# Altium PCB LiDAR_mainboard.PcbDoc
Units mm, origin at the board's own origin, x right, y up, seen from the top; angles counter-clockwise.
Board outline 65 x 56 mm, 2 copper layers (Top Layer, Bottom Layer); 61 components, 61 nets, 328 pads, 216 vias.
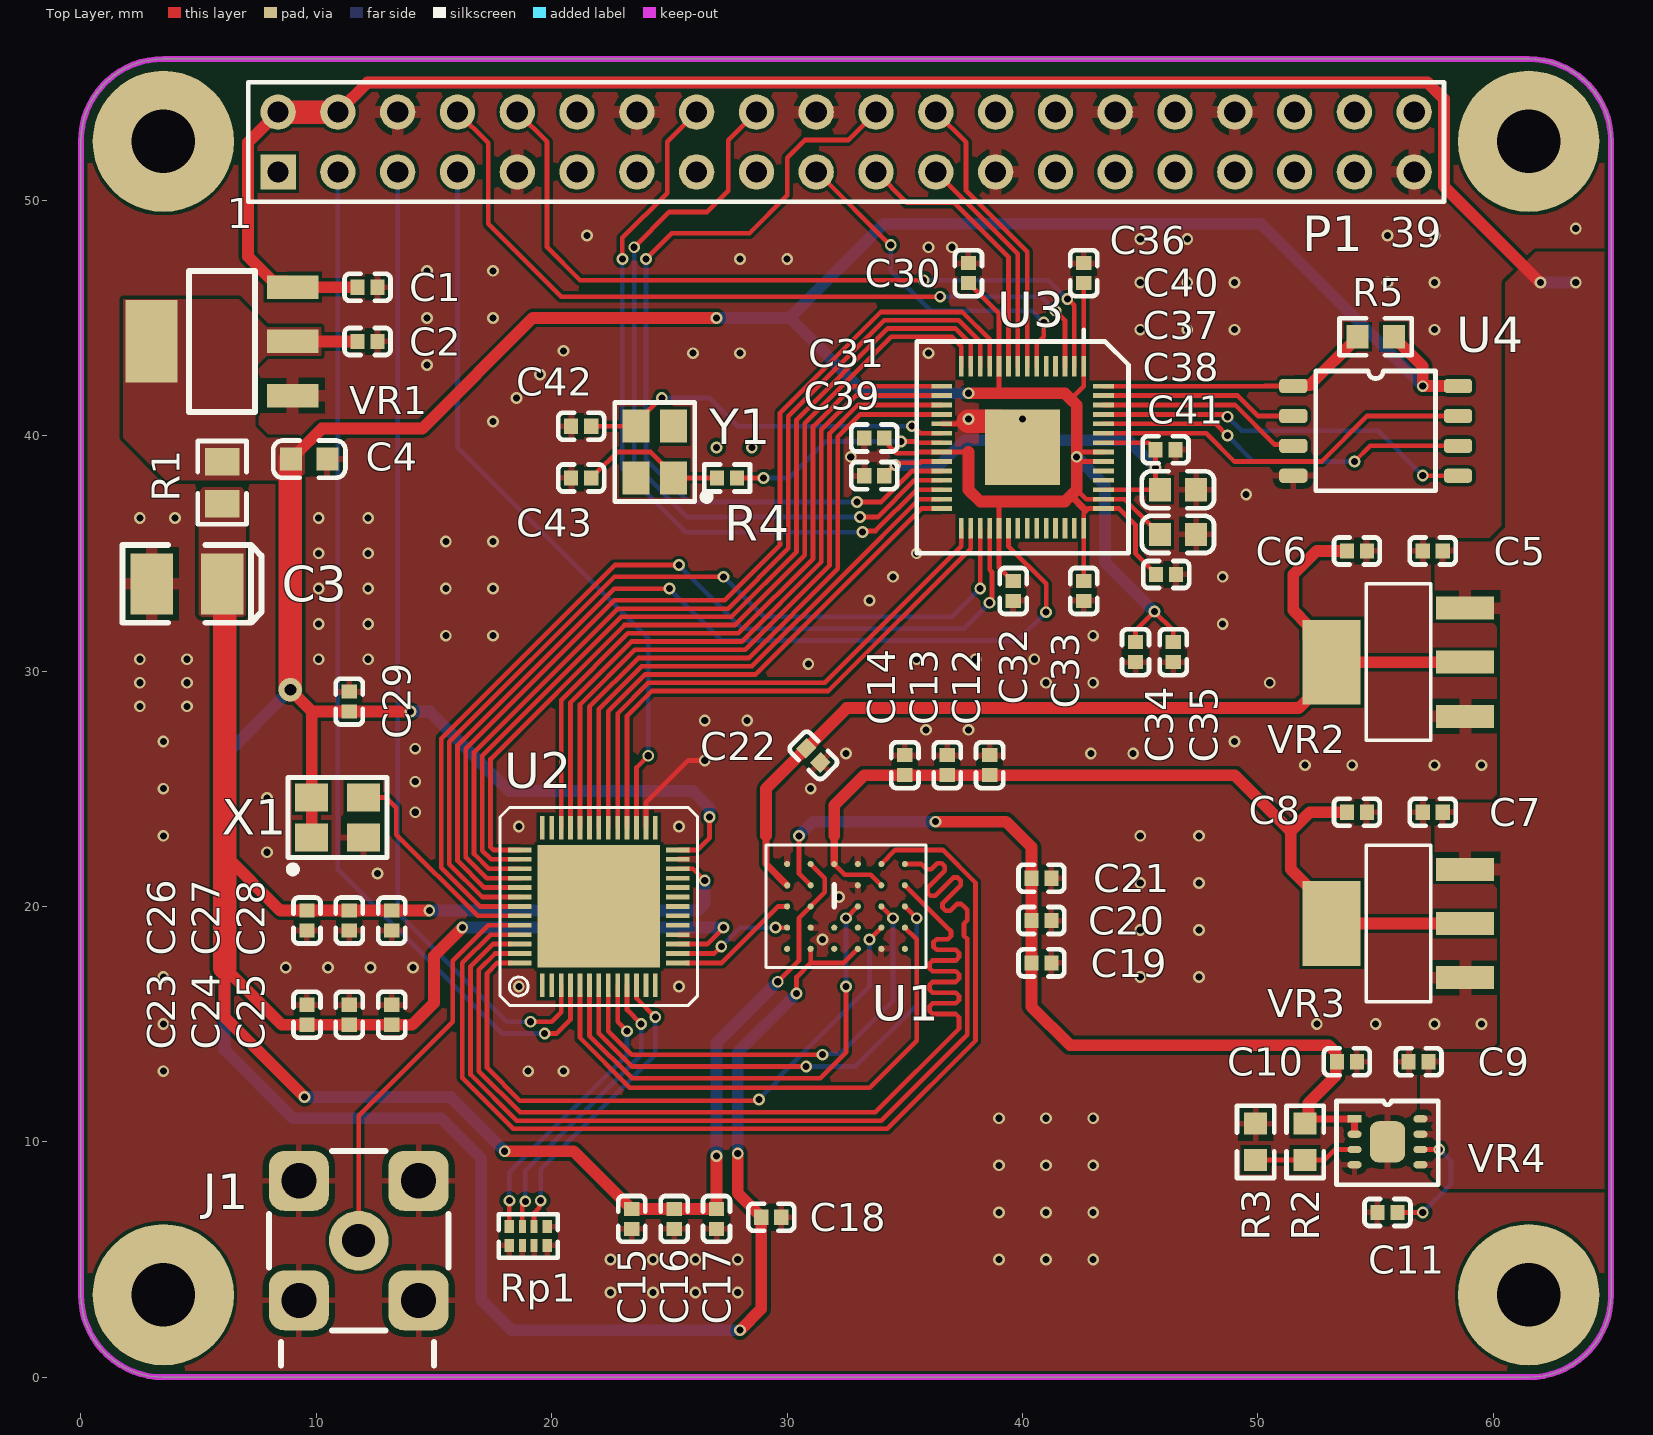
[diagram p0: Top Layer view]
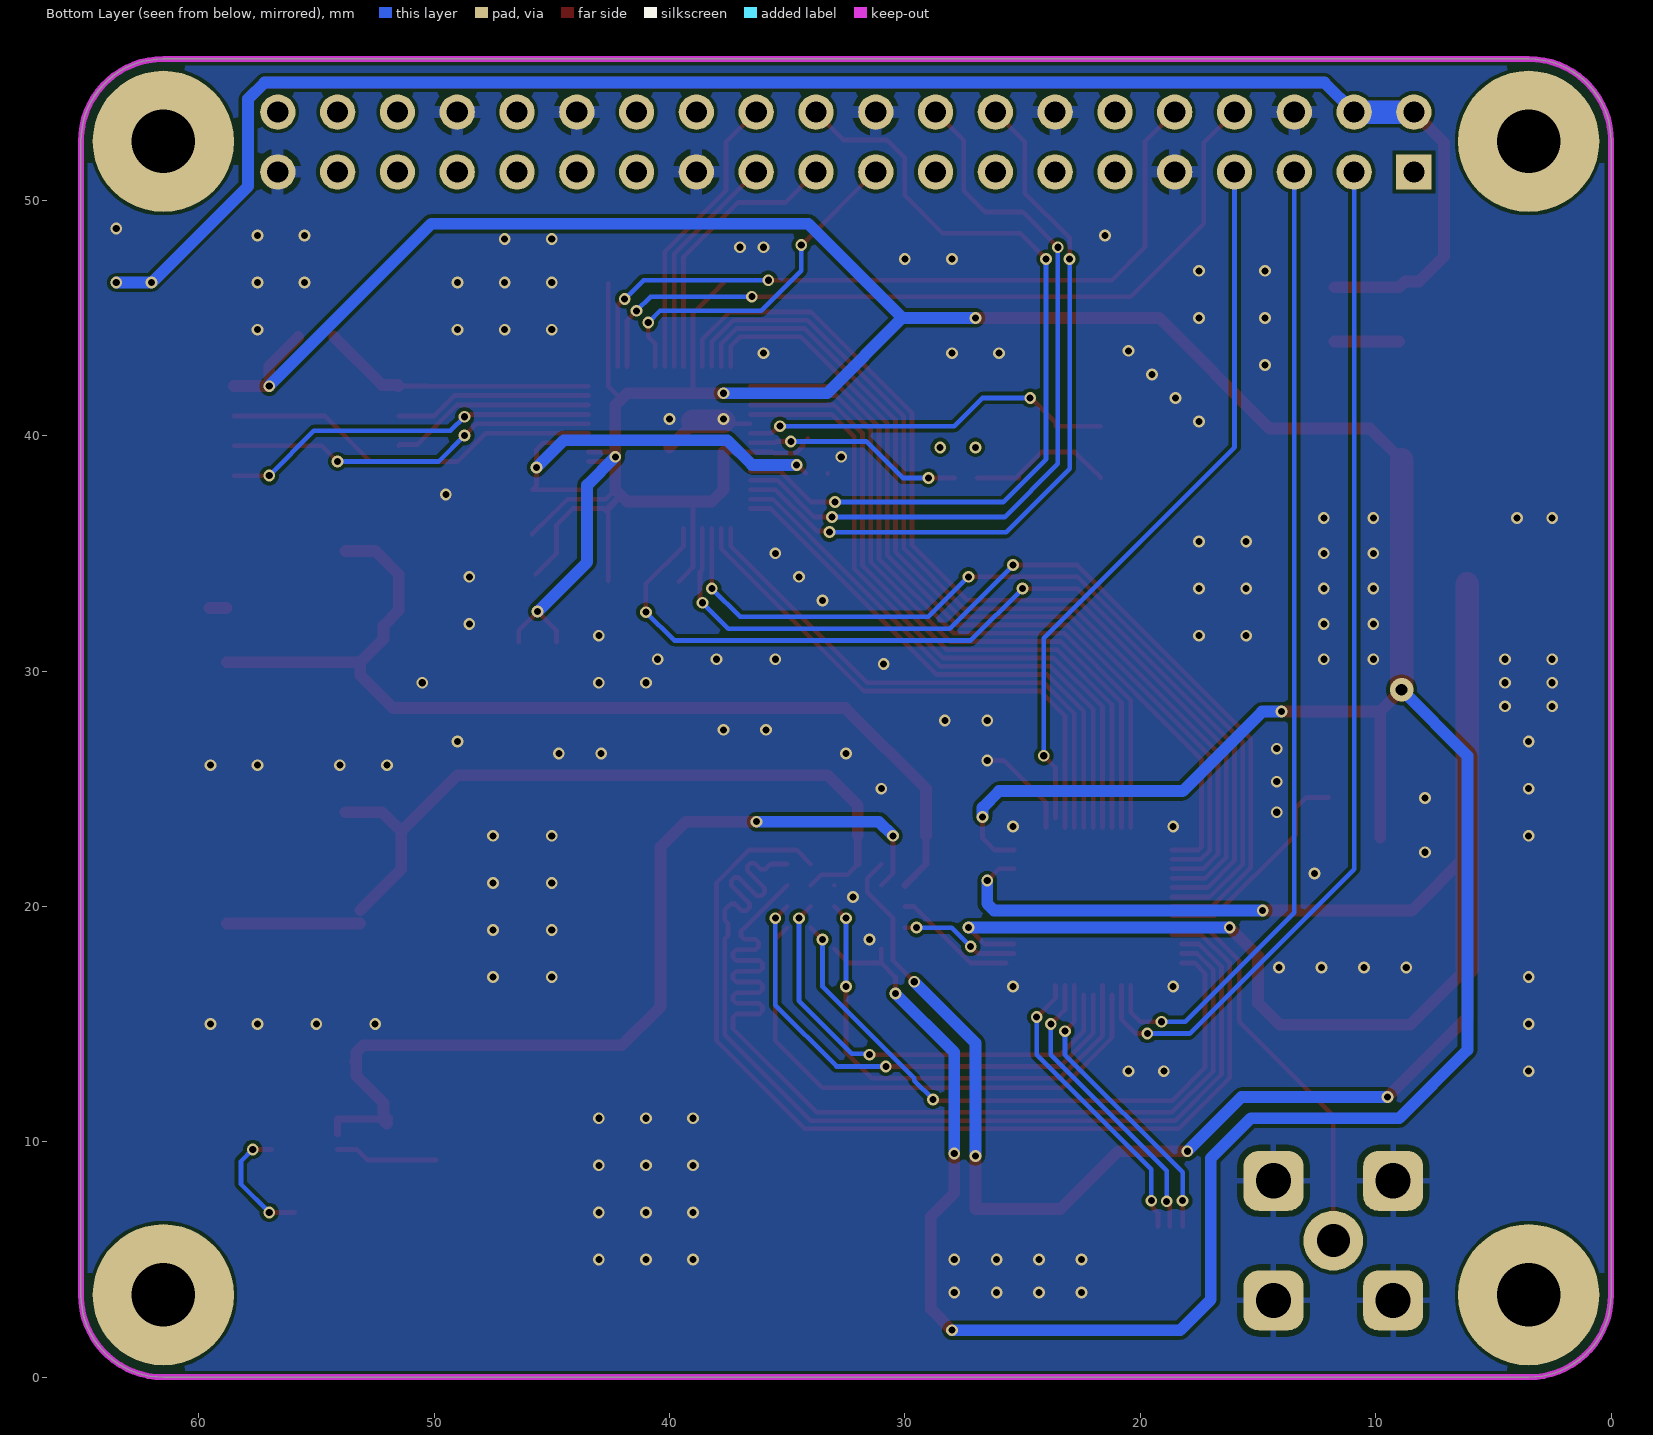
[diagram p1: Bottom Layer view, seen from below]
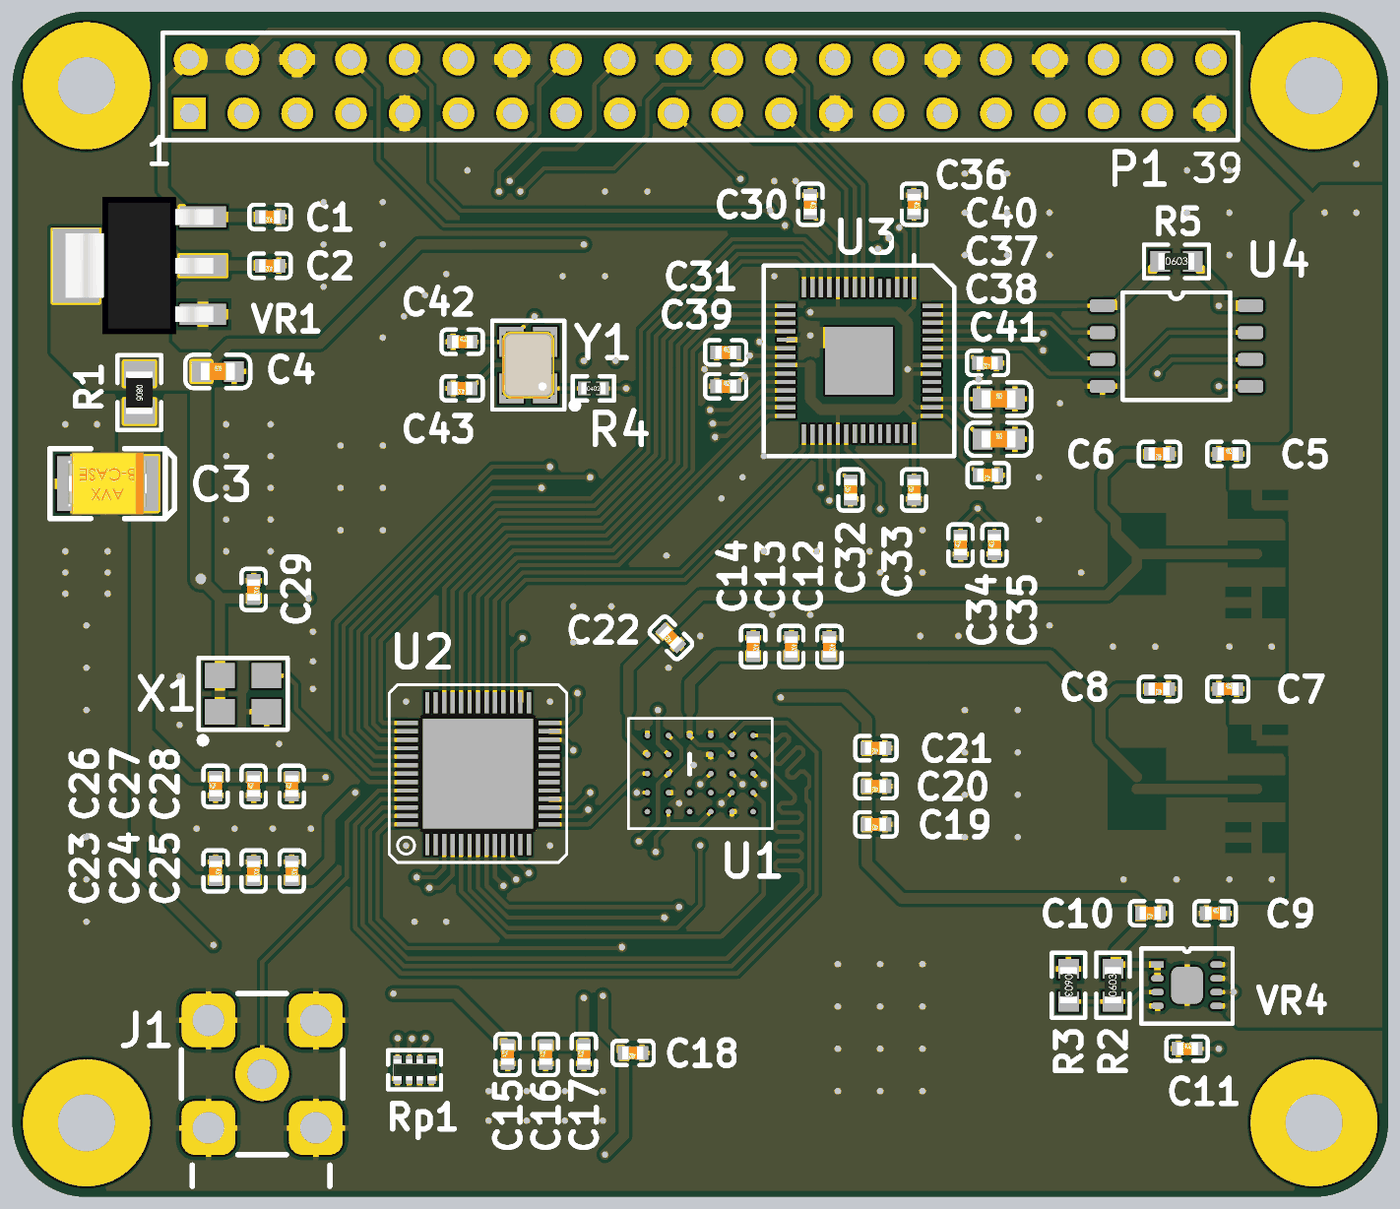
[diagram p2: 3D render of the assembled board from above, using the file's embedded part models]

## Layer stack, top to bottom
Top Solder: solder mask 0.0102, Solder Resist, Dk 3.5
Top Layer: signal copper 0.0356
Dielectric 1: dielectric 0.32, FR-4, Dk 4.8
Bottom Layer: signal copper 0.0356
Bottom Solder: solder mask 0.0102, Solder Resist, Dk 3.5

## Board outline
0,3.5 0,52.5 -0.001,52.5 cw(c3.5,52.5) 3.5,56.001 61.499,56.001 61.5,56 cw(c61.5,52.5) 65,52.5 65,3.5 cw(c61.5,3.5) 61.5,0 3.5,0 cw(c3.5,3.5)

## Design rules (kind name [scope] priority, off if disabled: settings)
Clearance [All] p1: gap=0.15 ignorepadtopadclearanceinfootprint=FALSE except(0: Arc-Hole Track-Hole SMDPad-Hole THPad-Hole Via-Hole Fill-Hole Poly-Hole Region-Hole Text-Hole)
HoleSize [All] p1: absolutevalues=TRUE maxlimit=6.3 minlimit=0.3 maxpercent=80.000 minpercent=20.000
Length Vout [InNetClass('Vout[2..1]')] p1: maxlimit=10 minlimit=0
MatchedLengths VTX_match [InNetClass('VTX[3..1]')] p1: tolerance=0.1 checknetsindiffpair=FALSE checkdiffpairvsdiffpair=TRUE checkxsignals=TRUE checkothers=TRUE usedelayunits=TRUE delaytolerance=10.000000
MatchedLengths Vout_match [InNetClass('Vout[2..1]')] p2: tolerance=0.2 checknetsindiffpair=FALSE checkdiffpairvsdiffpair=TRUE checkxsignals=TRUE checkothers=TRUE
MatchedLengths Data_match [InNetClass('Data[11..0]')] p3: tolerance=5 checknetsindiffpair=FALSE checkdiffpairvsdiffpair=TRUE checkxsignals=TRUE checkothers=TRUE usedelayunits=TRUE delaytolerance=5000.000000
MinimumSolderMaskSliver [All] p1: minsoldermaskwidth=0.08
PolygonConnect [All] p1: connectstyle=Relief reliefconductorwidth=0.254 reliefentries=4 polygonreliefangle="90 Angle" airgapwidth=0.254
RoutingCorners RoutingCorners_Matching [InNetClass('Vout[2..1]')] p1: cornerstyle=Round minsetback=0.5 maxsetback=1
RoutingCorners [All] p2: cornerstyle=45-Degree minsetback=1.27 maxsetback=2.54
RoutingVias [All] p1: holewidth=0.3 width=0.5 viastyle="Through Hole" minholewidth=0.3 minwidth=0.5 maxholewidth=0.5 maxwidth=1
SilkToSolderMaskClearance [IsPad] p1: minsilkscreentomaskgap=0.127 clearancetoexposedcopper=TRUE
SolderMaskExpansion [All] p1: expansion=0.102 istentingtop=FALSE
UnRoutedNet [All] p1: checkbadconnections=TRUE
Width [All] p1: maxlimit=2.54 minlimit=0.15 preferedwidth=0.2 minimp=50.000000 maximp=50.000000 favimp=50.000000
25 further rules are at their usual default settings.

## Classes and differential pairs
net class QSPI_SD[3..0]: QSPI_SD0 QSPI_SD1 QSPI_SD2 QSPI_SD3
net class VTX[3..1]: VTX1 VTX2 VTX3
net class Vout[2..1]: Vout1 Vout2
net class Data[11..0]: Data0 Data1 Data2 Data3 Data4 Data5 Data6 Data7 Data8 Data9 Data10 Data11

## Components (designator, comment, footprint, x,y, rotation, side; value= is the part's Value field where it differs from the comment)
C1 "10uF" 0402_C 12.175,46.3 r180 top
C2 "10uF" 0402_C 12.175,44 r180 top
C3 "100uF" CASE-B_3528 4.5,33.7 r0 top
C4 "10uF" 0603_C 9.7,39 r0 top
C5 "10uF" 0402_C 57.425,35.1 r0 top
C6 "10uF" 0402_C 54.2,35.1 r180 top
C7 "10uF" 0402_C 57.425,24 r0 top
C8 "10uF" 0402_C 54.2,24 r180 top
C9 "4.7uF" 0402_C 56.825,13.4 r0 top
C10 "4.7uF" 0402_C 53.775,13.4 r180 top
C11 "10nF" 0402_C 55.5,7 r0 top
C12 "10uF" 0402_C 38.6,26 r270 top
C13 "100nF" 0402_C 36.8,26 r270 top
C14 "10nF" 0402_C 35,26 r270 top
C15 "10uF" 0402_C 23.4,6.725 r90 top
C16 "100nF" 0402_C 25.2,6.725 r90 top
C17 "10nF" 0402_C 27,6.725 r90 top
C18 "100nF" 0402_C 29.325,6.8 r180 top
C19 "10uF" 0402_C 40.8,17.6 r180 top
C20 "100nF" 0402_C 40.8,19.4 r180 top
C21 "10nF" 0402_C 40.8,21.2 r180 top
C22 "100nF" 0402_C 31.113,26.412 r135 top
C23 "10uF" 0402_C 9.6,15.4 r270 top
C24 "100nF" 0402_C 11.4,15.4 r270 top
C25 "10nF" 0402_C 13.2,15.4 r270 top
C26 "10uF" 0402_C 9.6,19.4 r90 top
C27 "100nF" 0402_C 11.4,19.4 r90 top
C28 "10nF" 0402_C 13.2,19.4 r90 top
C29 "100nF" 0402_C 11.4,28.7 r270 top
C30 "100nF" 0402_C 37.7,46.9 r270 top
C31 "100nF" 0402_C 33.7,39.9 r0 top
C32 "100nF" 0402_C 39.6,33.4 r90 top
C33 "100nF" 0402_C 42.6,33.4 r90 top
C34 "100nF" 0402_C 44.8,30.8 r90 top
C35 "100nF" 0402_C 46.4,30.8 r90 top
C36 "100nF" 0402_C 42.6,46.9 r270 top
C37 "1uF" 0603_C 46.6,37.7 r0 top
C38 "1uF" 0603_C 46.6,35.8 r0 top
C39 "100nF" 0402_C 33.7,38.3 r0 top
C40 "100nF" 0402_C 46.075,39.4 r180 top
C41 "100nF (104) 10% 16V" 0402_C 46.1,34.1 r180 top
C42 "30pF" 0402_C 21.25,40.4 r0 top
C43 "30pF" 0402_C 21.25,38.2 r180 top
J1 "SMA_connector" SMA_header 11.8,5.8 r0 top
P1 "Header 20X2" HDR2X20 8.375,51.2 r0 top
R1 "0Ω (0R0) ±1%" 0805_R 6,38 r270 top
R2 "0Ω" 0603_R 52,10 r90 top
R3 "10KΩ" 0603_R 49.9,10 r270 top
R4 "1KΩ" 0402_R 27.45,38.2 r0 top
R5 "10KΩ (1002) ±1%" 0603_R 55,44.2 r0 top
Rp1 "10KΩ (103) ±5%" 0402_Rx4 19,6 r0 top
U1 "S15454-01WT Distance Area Image Sensor" S15454-01WT 32.5,20 r0 top
U2 "H15472-01" H15472-01 22,20 r0 top
U3 "RP2040" QFN-56 40,39.5 r270 top
U4 "W25Q128" SOIC-8 55,40.2 r0 top
VR1 "AMS1117-3.3" SOT-223 6,44 r0 top
VR2 "AMS1117-2.5" SOT-223-4_L6.5-W3.5-P2.30-LS7.0-BR -414.655,360.5 r0 top
VR3 "AMS1117-1.8" SOT-223-4_L6.5-W3.5-P2.30-LS7.0-BR -414.655,349.4 r0 top
VR4 "TPS7A80" SON_8 54.1,10.975 r0 top
X1 "SG-8018CE-60.000000MHZ-TJHPA" OSC-SMD_4P-L3.2-W2.5-BL_SIT8008BI 10.9,23.5 r0 top
Y1 "12MHZ" SMD-3225_4P 24.375,39.3 r90 top

## Footprints (in the part's own frame and the unit in brackets; to place one, negate y for a bottom-side part, rotate by r counter-clockwise, add the part's x,y. Pads: shape width x height; smd on the part's side, far side on the other; paste and mask are expansions set on the pad)
0402_C [mm]
  rect 0.6x0.65 smd mask+0.051: 1(-0.425,0) 2(0.425,0)
  silkscreen extent -0.97,-0.58 0.97,0.58, body extent -0.48,-0.3 0.52,0.3, height 0.2
0402_R [mm]
  rect 0.6x0.65 smd mask+0.051: 1(-0.425,0) 2(0.425,0)
  silkscreen extent -0.97,-0.58 0.97,0.58, body extent -0.57,-0.27 0.58,0.28, height 0.41
0402_Rx4 [mm]
  rect 0.4x0.55 smd mask+0.051: 1(-0.8,-0.4) 4(0.8,-0.4) 5(0.8,0.4) 8(-0.8,0.4)
  rect 0.3x0.55 smd mask+0.051: 2(-0.25,-0.4) 3(0.25,-0.4) 6(0.25,0.4) 7(-0.25,0.4)
  silkscreen extent -1.25,-0.93 1.25,0.92, body extent -1,-0.5 1,0.5, height 0.45
0603_C [mm]
  rect 0.93x0.98 smd: 1(-0.77,0) 2(0.77,0)
  silkscreen extent -1.53,-0.79 1.54,0.79, body extent -0.8,-0.4 0.8,0.4, height 0.3
0603_R [mm]
  rect 0.93x0.98 smd: 1(-0.77,0) 2(0.77,0)
  silkscreen extent -1.53,-0.79 1.54,0.79, body extent -0.85,-0.4 0.85,0.4, height 0.56
0805_R [mm]
  rect 1.16x1.47 smd: 1(-0.89,0) 2(0.89,0)
  silkscreen extent -1.77,-1.04 1.77,1.03, body extent -1,-0.62 1,0.63, height 0.49
CASE-B_3528 [mm]
  rect 1.8x2.6 smd: 1(1.5,0) 2(-1.5,0)
  silkscreen extent -2.73,-1.65 3.16,1.65, body extent -1.85,-1.47 1.85,1.46, height 2.03
H15472-01 [mm]
  rect 5.2x5.2 smd mask+0.178: GND(0,0)
  rect 0.2x1 smd: P1(-2.4,-3.35) P2(-2,-3.35) P3(-1.6,-3.35) P4(-1.2,-3.35) P5(-0.8,-3.35) P6(-0.4,-3.35) P7(0,-3.35) P8(0.4,-3.35) P9(0.8,-3.35) P10(1.2,-3.35) P11(1.6,-3.35) P12(2,-3.35) P13(2.4,-3.35) P27(2.4,3.35) P28(2,3.35) P29(1.6,3.35) P30(1.2,3.35) P31(0.8,3.35) P32(0.4,3.35) P33(0,3.35) P34(-0.4,3.35) P35(-0.8,3.35) P36(-1.2,3.35) P37(-1.6,3.35) P38(-2,3.35) P39(-2.4,3.35)
  rect 1x0.2 smd: P14(3.35,-2.4) P15(3.35,-2) P16(3.35,-1.6) P17(3.35,-1.2) P18(3.35,-0.8) P19(3.35,-0.4) P20(3.35,0) P21(3.35,0.4) P22(3.35,0.8) P23(3.35,1.2) P24(3.35,1.6) P25(3.35,2) P26(3.35,2.4) P40(-3.35,2.4) P41(-3.35,2) P42(-3.35,1.6) P43(-3.35,1.2) P44(-3.35,0.8) P45(-3.35,0.4) P46(-3.35,0) P47(-3.35,-0.4) P48(-3.35,-0.8) P49(-3.35,-1.2) P50(-3.35,-1.6) P51(-3.35,-2) P52(-3.35,-2.4)
  silkscreen extent -4.2,-4.2 4.2,4.2, body extent -3.6,-3.6 3.6,3.6, height 0.86
HDR2X20 [mm] "Connector; Header; 20x2 Position"
  rect 1.5x1.5 hole 0.9: 1(0,0)
  round 1.5 hole 0.9: 2(0,2.54) 3(2.54,0) 4(2.54,2.54) 5(5.08,0) 6(5.08,2.54) 7(7.62,0) 8(7.62,2.54) 9(10.16,0) 10(10.16,2.54) 11(12.7,0) 12(12.7,2.54) 13(15.24,0) 14(15.24,2.54) 15(17.78,0) 16(17.78,2.54) 17(20.32,0) 18(20.32,2.54) 19(22.86,0) 20(22.86,2.54) 21(25.4,0) 22(25.4,2.54) 23(27.94,0) 24(27.94,2.54) 25(30.48,0) 26(30.48,2.54) 27(33.02,0) 28(33.02,2.54) 29(35.56,0) 30(35.56,2.54) 31(38.1,0) 32(38.1,2.54) 33(40.64,0) 34(40.64,2.54) 35(43.18,0) 36(43.18,2.54) 37(45.72,0) 38(45.72,2.54) 39(48.26,0) 40(48.26,2.54)
  silkscreen extent -1.27,-1.27 49.53,3.81
OSC-SMD_4P-L3.2-W2.5-BL_SIT8008BI [mm]
  rect 1.4x1.2 smd: 1(-1.1,-0.576) 3(1.1,1.124) 4(-1.1,1.124)
  rect 1.4x1.2 smd mask+0.102: 2(1.1,-0.576)
  silkscreen extent -2.1,-2.08 2.1,1.97
QFN-56 [mm]
  rect 0.875x0.2 smd: 1(-3.437,2.6) 2(-3.437,2.2) 3(-3.437,1.8) 4(-3.437,1.4) 5(-3.437,1) 6(-3.437,0.6) 7(-3.437,0.2) 8(-3.437,-0.2) 9(-3.437,-0.6) 10(-3.437,-1) 11(-3.437,-1.4) 12(-3.437,-1.8) 13(-3.437,-2.2) 14(-3.437,-2.6) 29(3.437,-2.6) 30(3.437,-2.2) 31(3.437,-1.8) 32(3.437,-1.4) 33(3.437,-1) 34(3.437,-0.6) 35(3.437,-0.2) 36(3.437,0.2) 37(3.437,0.6) 38(3.437,1) 39(3.437,1.4) 40(3.437,1.8) 41(3.437,2.2) 42(3.437,2.6)
  rect 0.2x0.875 smd: 15(-2.6,-3.437) 16(-2.2,-3.437) 17(-1.8,-3.437) 18(-1.4,-3.437) 19(-1,-3.437) 20(-0.6,-3.437) 21(-0.2,-3.437) 22(0.2,-3.437) 23(0.6,-3.437) 24(1,-3.437) 25(1.4,-3.437) 26(1.8,-3.437) 27(2.2,-3.437) 28(2.6,-3.437) 43(2.6,3.437) 44(2.2,3.437) 45(1.8,3.437) 46(1.4,3.437) 47(1,3.437) 48(0.6,3.437) 49(0.2,3.437) 50(-0.2,3.437) 51(-0.6,3.437) 52(-1,3.437) 53(-1.4,3.437) 54(-1.8,3.437) 55(-2.2,3.437) 56(-2.6,3.437)
  rect 3.2x3.2 smd: 57(0,0)
  silkscreen extent -5,-4.5 4.5,4.5
S15454-01WT [mm]
  rrect100% 0.26x0.26 smd: A1(-2.5,1.8) A2(-1.5,1.8) A3(-0.5,1.8) A4(0.5,1.8) A5(1.5,1.8) A6(2.5,1.8) B1(-2.5,0.9) B2(-1.5,0.9) B4(0.5,0.9) B5(1.5,0.9) B6(2.5,0.9) C1(-2.5,0) C2(-1.5,0) C4(0.5,0) C5(1.5,0) C6(2.5,0) D1(-2.5,-0.9) D2(-1.5,-0.9) D3(-0.5,-0.9) D4(0.5,-0.9) D5(1.5,-0.9) D6(2.5,-0.9) E1(-2.5,-1.8) E2(-1.5,-1.8) E3(-0.5,-1.8) E4(0.5,-1.8) E5(1.5,-1.8) E6(2.5,-1.8)
  silkscreen extent -3.4,-2.6 3.4,2.6, body extent -3.4,-2.6 3.4,2.6, height 0.33
SMA_header [mm]
  round 2.54 hole 1.4: 1(0,0)
  rrect50% 2.54x2.54 hole 1.5: 2(-2.54,2.54) 3(-2.54,-2.54) 4(2.54,-2.54) 5(2.54,2.54)
  silkscreen extent -3.81,-3.81 3.81,3.81
SMD-3225_4P [mm]
  rect 1.4x1.15 smd: 1(-1.1,-0.8) 2(1.1,-0.8) 3(1.1,0.8) 4(-1.1,0.8)
  silkscreen extent -2.1,-2.35 2.1,1.7, body extent -1.6,-1.25 1.6,1.25, height 0.61
SOIC-8 [mm]
  rrect50% 1.2x0.6 smd: 1(-3.5,1.905) 2(-3.5,0.635) 3(-3.5,-0.635) 4(-3.5,-1.905) 5(3.5,-1.905) 6(3.5,-0.635) 7(3.5,0.635) 8(3.5,1.905)
  silkscreen extent -2.54,-2.54 2.54,2.54
SON_8 [mm]
  rect 0.6x0.31 smd: 1(0,0)
  oval 0.6x0.31 smd: 2(0,-0.65) 3(0,-1.3) 4(0,-1.95) 5(2.8,-1.95) 6(2.8,-1.3) 7(2.8,-0.65) 8(2.8,0)
  rrect50% 1.5x1.75 smd: 9(1.4,-0.975)
  silkscreen extent -0.76,-2.79 3.56,0.76
SOT-223 [mm]
  rect 2.2x1 smd: 1(3,-2.3) 2(3,0) 3(3,2.3)
  rect 2.2x3.5 smd: 2(-3,0)
  silkscreen extent -1.4,-3 1.4,3, body extent -3.49,-3.24 3.49,3.24, height 1.64
SOT-223-4_L6.5-W3.5-P2.30-LS7.0-BR [mm]
  rect 2.47x0.98 smd: 1(473.455,-332.424) 2(473.455,-330.124) 3(473.455,-327.824)
  rect 2.47x3.6 smd: 4(467.785,-330.124)
  silkscreen extent 469.25,-333.45 471.99,-326.8

## Part data
C1 C2 C5 C6 C7 C8 C12 C15 C19 C23 C26: library part "0402 10uF (106) 20% 6.3V", "贴片电容", Package=0402, SuppliersPartNumber=C15525, ComponentLink1Description=供应商链接, ComponentLink1URL=http://www.szlcsc.com/product/details_16204.html, Supplier=LC
C3: library part "3528 100uF (107) 10% 6.3V", "钽电容", Package=3528, SuppliersPartNumber=C16133, ComponentLink1Description=供应商链接, ComponentLink1URL=http://www.szlcsc.com/product/details_16815.html, Supplier=LC
C4: library part "0603 10uF (106) 10% 10V", "贴片电容", Package=0603, SuppliersPartNumber=C19702, ComponentLink1Description=供应商链接, ComponentLink1URL=http://www.szlcsc.com/product/details_20411.html, Supplier=LC
C9 C10: library part "0402 4.7uF (475) 20% 10V", "贴片电容", Package=0402, SuppliersPartNumber=C23733, ComponentLink1Description=供应商链接, ComponentLink1URL=http://www.szlcsc.com/product/details_24469.html, Supplier=LC
C11 C14 C17 C21 C25 C28: library part "0402 10nF (103) 10% 50V", "贴片电容", Package=0402, SuppliersPartNumber=C15195, ComponentLink1Description=供应商链接, ComponentLink1URL=http://www.szlcsc.com/product/details_15869.html, Supplier=LC
C13 C16 C18 C20 C22 C24 C27 C29 C30 C31 C32 C33 C34 C35 C36 C39 C40 C41: library part "0402 100nF (104) 10% 16V", "贴片电容", Package=0402, SuppliersPartNumber=C1525, ComponentLink1Description=供应商链接, ComponentLink1URL=http://www.szlcsc.com/product/details_1877.html, Supplier=LC
C37 C38: library part "0603 1uF (105) 10% 50V", "贴片电容", Package=0603, SuppliersPartNumber=C15849, ComponentLink1Description=供应商链接, ComponentLink1URL=http://www.szlcsc.com/product/details_16531.html, Supplier=LC
C42 C43: library part "0402 30pF (300) 5% 50V", "贴片电容", Package=0402, SuppliersPartNumber=C1570, ComponentLink1Description=供应商链接, ComponentLink1URL=http://www.szlcsc.com/product/details_1922.html, Supplier=LC
P1: "Header, 20-Pin, Dual row", LatestRevisionDate=17-Jul-2002, LatestRevisionNote="Re-released for DXP Platform.", Publisher="Altium Limited"
R1: library part "0805 0Ω (0R0) 1%", "贴片电阻", Package=0805, SuppliersPartNumber=C17477, ComponentLink1Description=供应商链接, ComponentLink1URL=http://www.szlcsc.com/product/details_18165.html, Supplier=LC
R2: library part "0603 0Ω (0R0) 1%", "贴片电阻", Package=0603, SuppliersPartNumber=C21189, ComponentLink1Description=供应商链接, ComponentLink1URL=http://www.szlcsc.com/product/details_21903.html, Supplier=LC
R3 R5: library part "0603 10KΩ (1002) 1%", "贴片电阻", Package=0603, SuppliersPartNumber=C25804, ComponentLink1Description=供应商链接, ComponentLink1URL=http://www.szlcsc.com/product/details_26547.html, Supplier=LC
R4: library part "0402 1KΩ (1001) 1%", "贴片电阻", Package=0402, SuppliersPartNumber=C11702, ComponentLink1Description=供应商链接, ComponentLink1URL=http://www.szlcsc.com/product/details_12256.html, Supplier=LC
Rp1: library part "0402*4 10KΩ (103) 5%", "贴片排阻", Package=0402*4, SuppliersPartNumber=C25725, ComponentLink1Description=供应商链接, ComponentLink1URL=http://www.szlcsc.com/product/details_26468.html, Supplier=LC
U1: library part S15454-01WT, "Hamamatsu area distance image sensor", DeviceSetName=S15454-01WT, GateName_1=G$1, LibraryName="Hamamatsu Distance Image Sensors", Package=S15454-01WT, SymbolName_1=S15454-01WT
U2: "ASIC for distance image sensors", DeviceSetName=H15472-01, GateName_1=G$1, LibraryName="Hamamatsu Distance Image Sensors", Package=H15472-01, SymbolName_1=H15472-01
VR1: library part "SOT-223 AMS1117-3.3", "低压差线性稳压(LDO)", Package=SOT-223, SuppliersPartNumber=C6186, ComponentLink1Description=供应商链接, ComponentLink1URL=http://www.szlcsc.com/product/details_6652.html, Supplier=LC
Y1: library part "SMD-3225_4P  12MHZ 20PF 10PPM", "贴片晶振", Package=SMD-3225_4P, SuppliersPartNumber=C9002, ComponentLink1Description=供应商链接, ComponentLink1URL=http://www.szlcsc.com/product/details_9522.html, Supplier=LC

## Free pads (board coordinates)
  round 6 hole 2.7: 1(3.5,52.5) 2(61.5,52.5) 3(3.5,3.5) 4(61.5,3.5)

## Via types
v1: diameter 0.5, hole 0.3, Top Layer to Bottom Layer, tented both sides, 214 vias
v2: diameter 0.5, hole 0.3, Top Layer to Bottom Layer, tented bottom, 1 vias
v3: diameter 1, hole 0.5, Top Layer to Bottom Layer, tented both sides, 1 vias

## Nets (pads, with @x,y where several pads share a name; then routed paths per layer and width w, separated by ;. In a path a pad name is that pad's centre, name@x,y a point inside that pad or via, vN(x,y) a via of type N, cw(c..) or ccw(c..) an arc to the next point about the centre after c; other vN are vias at no path point)
+A0V8: C10.2 C19.2 C20.2 C21.2 R2.2 U1.B2 VR4.1 VR4.2 | length 39.7
  Top Layer w0.2: v1(30.5,23) 30.5,21.399 U1.B2
  Top Layer w0.3: R2.2@52.205,10.975 VR4.1 VR4.2
  Top Layer w0.5: v1(36.3,23.6) 39.3,23.6 40.375,22.525 C21.2 C20.2 C19.2 40.375,15.741 42.016,14.1 53.007,14.1 53.3,13.807 53.3,13.45 C10.2 53.3,13.35 53.3,12.8 52.143,11.643 52.143,10.985 52.133,10.975 R2.2@52,10.975 ; R2.2 R2.2@52.205,10.975
  Bottom Layer w0.5: v1(30.5,23) 31.1,23.6 v1(36.3,23.6)
+A1V8: C8.2 C12.2 C13.2 C14.2 U1.A3 U1.B5 VR3.2 VR3.4 | length 38.2
  Top Layer w0.2: U1.A3 32.45,21.35 33.55,21.35 U1.B5
  Top Layer w0.3: U1.A3 32,23
  Top Layer w0.5: 32,23 32,24.3 33.275,25.575 C14.2 C13.2 C12.2 ; C12.2@38.625,25.575 49.017,25.575 51.396,23.196 ; VR3.4 VR3.2 ; VR3.4@53.13,19.841 51.396,21.575 51.396,23.196 ; C8.2 52.2,24 51.396,23.196
+A2V5: C6.2 C22.2 U1.B1 VR2.2 VR2.4 | length 43.8
  Top Layer w0.3: 29.1,23 29.1,21.799 U1.B1
  Top Layer w0.5: 29.1,23 29.1,25 32.525,28.425 42,28.425 43.8,28.425 51.725,28.425 52.126,28.826 52.145,28.826 53.13,29.811 VR2.4 ; C6.2 52.5,35.1 51.5,34.1 51.5,32.576 52.145,31.931 52.145,31.361 VR2.4 ; VR2.2 VR2.4
+A3V3: C3.1 C15.2 C16.2 C17.2 C23.2 C24.2 C25.2 C26.2 C27.2 C28.2 R1.2 U1.A2 U1.C2 U2.P16 U2.P24 | length 110.6
  Top Layer w0.2: U2.P16 26.6,18.4 v1(27.3,19.1) ; U2.P24 26,21.599 v1(26.5,21.1) ; v1(29.6,16.8) 30.5,17.7 30.5,19.5 U1.C2 31.6,20.6 31.6,21.2 U1.A2
  Top Layer w0.5: 6.1,22.2 8.475,19.825 C26.2 C27.2 C28.2 v1(14.8,19.825) ; v1(9.5,11.9) 6.1,15.3 6.1,17.4 8.525,14.975 C23.2 C24.2 C25.2 14.075,14.975 15,15.9 15,17.9 v1(16.2,19.1) ; v1(18,9.6) 20.925,9.6 23.375,7.15 C15.2 C16.2 C17.2 v1(27,9.4)
  Top Layer w1: 6.1,17.4 6.1,22.2 C3.1@6.1,33.7
  Bottom Layer w0.5: v1(9.5,11.9) 15.7,11.9 v1(18,9.6) ; v1(14.8,19.825) 26.207,19.825 26.5,20.118 v1(26.5,21.1) ; v1(16.2,19.1) v1(27.3,19.1) ; v1(27,9.4) 27,14.2 v1(29.6,16.8)
+D1V1: C37.1 C39.2 C40.2 U3.23 U3.45 U3.50 | length 21
  Top Layer w0.2: C39.2@34.2,38.4 34.552,38.752 v1(34.596,38.752) ; v1@34.6,38.8 34.65,38.85 35.652,38.85 35.702,38.9 U3.23 ; U3.45 C37.1 45.65,37.88 v1(45.65,38.64) C40.2 45.35,39.7 U3.50
  Bottom Layer w0.5: v1(34.596,38.752) 36.493,38.752 37.541,39.8 44.49,39.8 v1(45.65,38.64)
+D3V3: C2.2 C4.1 C18.2 C29.2 C30.2 C31.2 C32.2 C33.2 C34.2 C35.2 C36.2 C38.1 C41.2 R1.1 R5.2 U1.E2 U1.E4 U2.P26 U3.1 U3.10 U3.22 U3.33 U3.42 U3.43 U3.44 U3.48 U3.49 U4.8 VR1.2 X1.1 X1.4 | length 235.5
  Top Layer w0.2: U2.P26 26.2,22.4 26.7,22.9 v1(26.7,23.8) ; v1(30.4,16.3) 30.4,17 31,17.6 ; U1.E2 31,17.6 ; U1.E4 32.4,17.6 31,17.6 ; C31.2@34.125,39.875 34.325,39.675 34.325,39.561 34.636,39.25 35.557,39.25 35.607,39.3 U3.22 37.7,39.3 ; C30.2 37.725,46.475 37.925,46.275 37.925,46.25 39,45.175 U3.10 39,41.8 ; 39,37.2 U3.33 39,34.4 39.375,34.025 C32.2@39.6,33.8 ; 42.05,41.55 42.6,42.1 U3.1 C36.2 ; 42.3,37.7 42.7,37.3 U3.44 44.33,37.3 45.44,36.19 45.465,36.19 45.83,35.825 C38.1 ; v1@42.3,38.9 U3.48 ; v1@42.3,39.3 U3.49 ; C33.2 U3.42 42.6,36.7 42.8,36.9 U3.43 44.1,36.9 44.8,36.2 44.8,34.975 C41.2 ; C34.2 44.8,31.725 v1(45.6,32.525) 46.4,31.725 C35.2
  Top Layer w0.3: 42.05,37.45 42.641,36.859
  Top Layer w0.5: v3(8.9,29.2) 9.8,28.3 9.8,28.275 ; C4.1 8.93,39.025 9.145,39.24 9.17,39.24 10.23,40.3 14.5,40.3 19.2,45 v1(27,45) ; VR1.2@9,44 C2.2 ; X1.1 X1.4@9.8,24.523 ; X1.4 9.8,28.275 ; v1(14,28.275) C29.2 9.8,28.275 ; v1(27.9,9.5) 27.9,7.825 28.9,6.825 C18.2 ; v1(28,2) 28.9,2.9 C18.2@28.9,6.775 ; 37.7,39.3 37.7,37.7 38.2,37.2 39,37.2 41.8,37.2 42.05,37.45 42.3,37.7 42.3,38.9 v1(42.3,39.1) 42.3,39.3 42.3,41.3 42.05,41.55 41.8,41.8 v1(37.7,41.8) ; R5.2 55.77,44.175 57,42.945 v1(57,42.1) 57.005,42.105 U4.8
  Top Layer w1: v3(8.9,29.2) C4.1@8.9,38.97
  Bottom Layer w0.5: v3(8.9,29.2) 6.1,26.4 6.1,13.9 9,11 15.3,11 17,9.3 17,3.3 18.3,2 v1(28,2) ; v1(14,28.275) 14.825,28.275 18.2,24.9 26,24.9 26.7,24.2 v1(26.7,23.8) ; v1(27,45) 30.1,45 ; v1(27.9,9.5) 27.9,13.8 v1(30.4,16.3) ; v1(37.7,41.8) 33.3,41.8 30.1,45 ; v1(42.3,39.1) 43.5,37.9 43.5,34.625 v1(45.6,32.525) ; v1(57,42.1) 57,42.11 50.11,49 34.1,49 30.1,45
+D5V0: C1.2 C5.2 C7.2 C9.2 P1.2 P1.4 VR1.3 VR2.3 VR3.3 VR4.5 VR4.7 VR4.8 | length 133.8
  Top Layer w0.5: P1.2 7.1,52.465 7.1,47.6 8.15,46.55 8.75,46.55 VR1.3 C1.2 ; P1.4 12.175,55 57.2,55 57.9,54.3 57.9,50.6 v1(62,46.5) ; VR2.3 VR2.3@59.545,32.676
  Top Layer w1: P1.2 P1.4
  Bottom Layer w0.5: P1.4 12.175,55 57.2,55 57.9,54.3 57.9,50.6 v1(62,46.5) v1(63.5,46.5)
  Bottom Layer w1: P1.2 P1.4
All_Reset: P1.7 U2.P29 | length 31
  Top Layer w0.2: U2.P29@23.6,23.75 23.6,25.9 v1(24.1,26.4)
  Bottom Layer w0.2: P1.7 15.995,39.505 24.1,31.4 v1(24.1,26.4)
CLK_60M: U2.P47 X1.3 | length 9.4
  Top Layer w0.2: X1.3 12.964,24.624 13.4,24.188 13.4,23.052 16.852,19.599 U2.P47
Data0: U2.P43 U3.11 | length 42.1
  Top Layer w0.2: U2.P43 17.232,21.199 16.35,22.082 16.35,26.695 22.655,33 27.345,33 29.7,35.355 29.7,40.965 33.985,45.25 37.435,45.25 38.6,44.085 U3.11
Data1: U2.P42 U3.12 | length 40.3
  Top Layer w0.2: U2.P42 17.327,21.599 16.7,22.227 16.7,26.55 22.8,32.65 27.49,32.65 30.05,35.21 30.05,40.82 34.13,44.9 37.29,44.9 38.2,43.99 U3.12
Data2: U2.P41 U3.13 | length 38.6
  Top Layer w0.2: U2.P41 17.422,22 17.05,22.372 17.05,26.405 22.945,32.3 27.635,32.3 30.4,35.065 30.4,40.675 34.275,44.55 37.145,44.55 37.8,43.895 U3.13
Data3: U2.P40 U3.14 | length 36.8
  Top Layer w0.2: U2.P40 17.517,22.4 17.4,22.517 17.4,26.26 23.09,31.95 27.78,31.95 30.75,34.92 30.75,40.53 34.42,44.2 37,44.2 37.4,43.8 U3.14
Data4: U2.P37 U3.15 | length 30.4
  Top Layer w0.2: U2.P37 20.4,28.765 23.235,31.6 27.925,31.6 31.1,34.775 31.1,40.385 32.815,42.1 U3.15
Data5: U2.P36 U3.16 | length 29.8
  Top Layer w0.2: U2.P36 20.8,28.67 23.38,31.25 28.07,31.25 31.45,34.63 31.45,40.24 32.91,41.7 U3.16
Data6: U2.P35 U3.17 | length 29.1
  Top Layer w0.2: U2.P35 21.2,28.575 23.525,30.9 28.215,30.9 31.8,34.485 31.8,40.095 33.005,41.3 U3.17
Data7: U2.P34 U3.18 | length 28.5
  Top Layer w0.2: U2.P34 21.6,28.48 23.67,30.55 28.36,30.55 32.15,34.34 32.15,39.95 33.1,40.9 U3.18
Data8: U2.P33 U3.27 | length 23.3
  Top Layer w0.2: U2.P33 22,28.385 23.815,30.2 28.505,30.2 32.5,34.195 32.5,34.2 35.6,37.3 U3.27
Data9: U2.P32 U3.28 | length 22.7
  Top Layer w0.2: U2.P32 22.4,28.29 23.96,29.85 28.65,29.85 35.7,36.9 U3.28
Data10: U2.P31 U3.29 | length 23.2
  Top Layer w0.2: U2.P31 22.8,28.195 24.105,29.5 31.605,29.5 37.4,35.295 U3.29
Data11: U2.P30 U3.30 | length 23.2
  Top Layer w0.2: U2.P30 23.2,28.1 24.25,29.15 31.75,29.15 37.8,35.2 U3.30
Ext_Reset: U1.C5 U2.P8 | length 19.2
  Top Layer w0.2: U2.P8@22.4,16.25 22.4,14.7 23.4,13.7 v1(31.5,13.7) ; U1.C5 34.02,19.98 v1(34.5,19.5)
  Bottom Layer w0.2: v1(31.5,13.7) 31.546,13.746 32.246,13.746 34.5,16 v1(34.5,19.5)
FV: U2.P46 U3.32 | length 40.7
  Top Layer w0.2: U2.P46 16.947,20 15.3,21.647 15.3,27.13 22.67,34.5 v1(25.4,34.5) ; v1(38.6,32.9) 38.6,32.981 38.7,33.081 38.7,34.205 38.6,34.305 U3.32
  Bottom Layer w0.2: v1(25.4,34.5) 28.1,31.8 37.5,31.8 v1(38.6,32.9)
GND: C1.1 C2.1 C3.2 C4.2 C5.1 C6.1 C7.1 C8.1 C9.1 C10.1 C11.1 C12.1 C13.1 C14.1 C15.1 C16.1 C17.1 C18.1 C19.1 C20.1 C21.1 C22.1 C23.1 C24.1 C25.1 C26.1 C27.1 C28.1 C29.1 C30.1 C31.1 C32.1 C33.1 C34.1 C35.1 C36.1 C37.2 C38.2 C39.1 C40.1 C41.1 C42.1 C43.2 J1.2 J1.3 J1.4 J1.5 P1.6 P1.9 P1.14 P1.20 P1.25 P1.30 P1.34 P1.39 R3.1 Rp1.1 Rp1.2 Rp1.3 Rp1.4 Rp1.5 U1.A1 U1.A4 U1.B4 U1.D2 U1.E5 U2.P17 U2.P25 U2.P28 U3.19 U3.57 U4.4 VR1.1 VR2.1 VR3.1 VR4.4 VR4.9 X1.2 | length 8.2
  Top Layer w0.2: U2.P28 24,24.4 25.8,26.2 v1(26.5,26.2) ; C39.1@33.275,38.375 C39.1@33.275,38.4 ; U3.19 v1@37.7,40.5
  Top Layer w0.5: U3.57@39,40.5 U3.57
  Top Layer w1: v1@37.7,40.6 U3.57@39,40.6
  other v1: 22.5,3.6 24.3,3.6 26.1,3.6 27.9,3.6 22.5,5 24.3,5 26.1,5 27.9,5 39,5 41,5 43,5 39,7 41,7 43,7 39,9 41,9 43,9 39,11 41,11 43,11 3.5,13 19,13 20.5,13 3.5,15 52.5,15 55,15 57.5,15 59.5,15 18.6,16.6 25.4,16.6 3.5,17 45,17 47.5,17 8.7,17.4 10.5,17.4 12.3,17.4 14.101,17.401 31.5,18.6 45,19 47.5,19 32.2,20.4 45,21 47.5,21 12.6,21.4 7.9,22.3 3.5,23 45,23 47.5,23 18.6,23.4 25.4,23.4 14.2,24 7.9,24.6 3.5,25 31,25 14.2,25.3 52,26 54,26 57.5,26 59.5,26 32.5,26.5 42.9,26.5 44.7,26.5 14.2,26.7 3.5,27 49,27 35.9,27.5 37.7,27.5 26.5,27.9 28.3,27.9 2.5,28.5 4.5,28.5 2.5,29.5 4.5,29.5 41,29.5 43,29.5 50.5,29.5 30.9,30.3 2.5,30.5 4.5,30.5 10.1,30.5 12.2,30.5 35.5,30.5 38,30.5 40.5,30.5 15.5,31.5 17.5,31.5 43,31.5 10.1,32 12.2,32 48.5,32 33.5,33 10.1,33.5 12.2,33.5 15.5,33.5 17.5,33.5 34.5,34 48.5,34 10.1,35 12.2,35 35.5,35 15.5,35.5 17.5,35.5 2.5,36.5 4,36.5 10.1,36.5 12.2,36.5 49.5,37.5 32.7,39.1 17.5,40.6 37.7,40.7 18.5,41.6 19.5,42.6 14.7,43 26,43.5 28,43.5 36,43.5 20.5,43.6 45,44.5 47,44.5 49,44.5 57.5,44.5 14.7,45 17.5,45 45,46.5 47,46.5 49,46.5 55.5,46.5 57.5,46.5 14.7,47 17.5,47 28,47.5 30,47.5 36,48 37,48 45,48.35 47,48.35 21.5,48.5 55.5,48.5 57.5,48.5 63.5,48.8
  other v2: 40,40.7
HST: U1.D6 U2.P5 | length 22.8
  Top Layer w0.2: U2.P5@21.2,16.25 21.2,14.415 23.315,12.3 33.5,12.3 35.5,14.3 35.5,18.6 U1.D6
LIGHT: J1.1 U2.P48 | length 17
  Top Layer w0.2: J1.1 11.8,11.1 15.8,15.1 15.8,17.695 17.304,19.199 U2.P48
LV: U2.P45 U3.31 | length 38
  Top Layer w0.2: U2.P45 17.042,20.4 15.65,21.792 15.65,26.985 22.665,34 26.429,34 v1(27.3,34) ; v1(38.2,33.5) U3.31
  Bottom Layer w0.2: v1(27.3,34) 29,32.3 37,32.3 v1(38.2,33.5)
MCLk: U1.D5 U2.P52 | length 26.8
  Top Layer w0.2: U2.P52@18.25,17.599 17.684,17.599 17.25,17.165 17.25,13.15 18.65,11.75 28.75,11.75 v1(28.8,11.8) ; v1(33.5,18.6) 33.98,19.08 U1.D5
  Bottom Layer w0.2: v1(28.8,11.8) 29.6,12.6 29.6,12.7 33.5,16.6 v1(33.5,18.6)
MCU_RESET_N: P1.16 U3.26 | length 31.9
  Top Layer w0.2: v1(23,47.5) 23,48.4 24.9,50.3 24.9,52.485 P1.16 ; v1(33.2,35.9) 33.25,35.95 33.75,35.95 35.5,37.7 U3.26
  Bottom Layer w0.2: v1(23,47.5) 23,38.6 25.7,35.9 v1(33.2,35.9)
P1: Rp1.8 U2.P9 | length 12.5
  Top Layer w0.2: Rp1.8 v1(18.2,7.5) ; U2.P9 22.8,15.1 v1(23.2,14.7)
  Bottom Layer w0.2: v1(18.2,7.5) 18.2,8.7 23.2,13.7 v1(23.2,14.7)
P2: Rp1.7 U2.P10 | length 12.6
  Top Layer w0.2: Rp1.7 18.75,7.319 18.879,7.447 v1(18.879,7.471) ; U2.P10 23.2,15.6 v1(23.8,15)
  Bottom Layer w0.2: v1(18.879,7.471) 18.879,8.775 23.8,13.696 v1(23.8,15)
P3: Rp1.6 U2.P11 | length 12.7
  Top Layer w0.2: Rp1.6 19.25,6.975 19.47,7.195 19.47,7.444 v1(19.528,7.501) ; U2.P11 23.6,16.096 24.396,15.3 v1(24.4,15.3)
  Bottom Layer w0.2: v1(19.528,7.501) 19.528,8.828 24.4,13.7 v1(24.4,15.3)
PCLK: U2.P44 U3.34 | length 41.4
  Top Layer w0.2: U2.P44 17.137,20.8 16,21.937 16,26.84 22.66,33.5 v1(25,33.5) ; U3.34 39.4,35.3 41,33.7 v1(41,32.5)
  Bottom Layer w0.2: v1(25,33.5) 27.2,31.3 39.8,31.3 v1(41,32.5)
QSPI_CLK: U3.52 U4.6 | length 16
  Top Layer w0.2: U3.52 48.2,40.5 v1(48.7,40) ; v1(54.1,38.9) 54.765,39.565 U4.6
  Bottom Layer w0.2: v1(48.7,40) 48.709,40 49.809,38.9 v1(54.1,38.9)
QSPI_SD0: U3.53 U4.5 | length 16.1
  Top Layer w0.2: U3.53 48.522,40.9 48.622,40.8 v1(48.704,40.8) ; v1(57,38.3) 57.002,38.297 U4.5@58.498,38.297
  Bottom Layer w0.2: v1(48.704,40.8) 49.304,40.2 55.1,40.2 v1(57,38.3)
QSPI_SD1: U3.55 U4.2 | length 8.4
  Top Layer w0.2: U3.55 49.132,41.7 49.997,40.835 U4.2
QSPI_SD2: U3.54 U4.3 | length 8.8
  Top Layer w0.2: U3.54 49.037,41.3 50.718,39.619 51.446,39.619 U4.3
QSPI_SD3: U3.51 U4.7 | length 16.4
  Top Layer w0.2: U3.51 47.8,40.1 49,38.9 52.7,38.9 54.635,40.835 U4.7
QSPI_SS: R5.1 U3.56 U4.1 | length 11.7
  Top Layer w0.2: U3.56 50.29,42.1 50.295,42.105 U4.1
  Top Layer w0.5: U4.1 51.55,42.155 52.21,42.155 54.23,44.175 R5.1
Reset: U1.C6 U2.P7 | length 21.2
  Top Layer w0.2: U2.P7@22,16.25 22,14.605 23.405,13.2 v1(30.808,13.2) ; U1.C6 35.02,19.98 v1(35.5,19.5)
  Bottom Layer w0.2: v1(30.808,13.2) 32.9,13.2 35.5,15.8 v1(35.5,19.5)
SCL: P1.5 U2.P3 | length 41.6
  Top Layer w0.2: v1(19.1,15.1) 20,15.1 20.4,15.5 U2.P3
  Bottom Layer w0.2: P1.5 13.455,45.455 13.455,19.74 13.926,19.269 18.095,15.1 v1(19.1,15.1)
SDA: P1.3 U2.P4 | length 44.1
  Top Layer w0.2: v1(19.7,14.6) 20.2,14.6 20.8,15.2 U2.P4
  Bottom Layer w0.2: P1.3 10.915,49.085 10.915,47.085 10.915,21.585 17.9,14.6 v1(19.7,14.6)
SPI_CLK: P1.23 U3.8 | length 9.7
  Top Layer w0.2: P1.23 39.8,47.715 U3.8
SPI_MISO: P1.21 U3.9 | length 11.8
  Top Layer w0.2: P1.21 35.075,49.9 37.1,49.9 39.4,47.6 U3.9
SPI_MOSI: P1.19 U3.6 | length 14.9
  Top Layer w0.2: P1.19 31.267,51.2 34.351,48.116 34.384,48.116 v1(34.4,48.1) ; U3.6 40.6,43.9 40.9,44.2 v1(40.9,44.8)
  Bottom Layer w0.2: v1(34.4,48.1) 34.4,47 36.1,45.3 40.4,45.3 v1(40.9,44.8)
SPI_SS: P1.24 U3.7 | length 12.4
  Top Layer w0.2: P1.24 37.6,52.455 37.6,50.41 40.2,47.81 U3.7
SWCLK: P1.22 U3.24 | length 35.7
  Top Layer w0.2: v1(24,47.5) 25.1,48.6 28.4,48.6 30,50.2 30,51.8 30.753,52.553 32.588,52.553 P1.22 ; v1(32.964,37.178) 33.985,37.178 35.307,38.5 U3.24
  Bottom Layer w0.2: v1(24,47.5) 24,39 25.822,37.178 v1(32.964,37.178)
SWDIO: P1.18 U3.25 | length 32.7
  Top Layer w0.2: v1(23.5,48) 25,49.5 26.6,49.5 27.5,50.4 27.5,52.545 P1.18 ; v1(33.093,36.541) 33.843,36.541 35.402,38.1 U3.25
  Bottom Layer w0.2: v1(23.5,48) 23.5,38.8 25.759,36.541 v1(33.093,36.541)
UART_MISO: P1.10 U3.2 | length 32.2
  Top Layer w0.2: P1.10 19.8,52.475 19.8,48 21.2,46.6 v1(35.8,46.6) ; v1@42,45.733 42.2,45.533 U3.2
  Bottom Layer w0.2: v1(35.8,46.6) 41.1,46.6 v1(41.9,45.8)
UART_MOSI: P1.8 U3.3 | length 33.4
  Top Layer w0.2: P1.8 17.3,52.435 17.3,49 20.4,45.9 v1(36.5,45.9) ; v1(41.4,45.3) 41.8,44.9 U3.3
  Bottom Layer w0.2: v1(36.5,45.9) 40.8,45.9 v1(41.4,45.3)
VFB: R2.1 R3.2 VR4.3 | length 4.4
  Top Layer w0.2: R3.2 R2.1 52.83,9.23 53.275,9.675 VR4.3
VNR: C11.2 VR4.6 | length 5.3
  Top Layer w0.2: C11.2 v1(57,7) ; VR4.6 v1(57.7,9.675)
  Bottom Layer w0.2: v1(57,7) 58.2,8.2 58.2,9.175 v1(57.7,9.675)
Vout1: U1.C1 U2.P14 | length 5.3
  Top Layer w0.2: U2.P14@25.7,17.599 27.214,17.599 29.614,20 U1.C1
Vout2: U1.D1 U2.P15 | length 5.1
  Top Layer w0.2: U2.P15 26.907,18 v1(27.204,18.296) ; v1(29.5,19.1) U1.D1
  Bottom Layer w0.2: v1(27.204,18.296) 28.007,19.1 v1(29.5,19.1)
VST: U1.C4 U2.P6 | length 20.7
  Top Layer w0.2: U2.P6 21.6,14.51 23.41,12.7 31.4,12.7 32.5,13.8 v1(32.5,16.6) ; v1(32.5,19.5) U1.C4
  Bottom Layer w0.2: v1(32.5,16.6) v1(32.5,19.5)
VTX1: U1.B6 U2.P51 | length 43.6
  Top Layer w0.2: U2.P51@18.25,18 17.589,18 16.9,17.31 16.9,13.005 18.655,11.25 33.75,11.25 37.3,14.8 37.3,15.193 37.3,15.293 37.164,15.429 36.178,15.429 36.042,15.565 36.042,15.747 36.178,15.883 37.164,15.883 37.3,16.019 37.3,16.201 37.164,16.337 36.178,16.337 36.042,16.473 36.042,16.655 36.178,16.791 37.164,16.791 37.3,16.927 37.3,17.109 37.164,17.245 36.178,17.245 36.042,17.381 36.042,17.563 36.178,17.699 37.164,17.699 37.3,17.835 37.3,18.017 37.164,18.153 36.348,18.153 36.212,18.289 36.212,18.471 36.348,18.607 36.827,18.607 36.964,18.743 36.964,18.936 36.801,19.099 U1.B6
VTX2: U1.A6 U2.P50 | length 43.5
  Top Layer w0.2: U2.P50@18.25,18.4 17.495,18.4 16.55,17.455 16.55,13.955 16.55,12.86 18.51,10.9 33.995,10.9 37.65,14.555 37.65,18.619 37.51,18.758 37.51,19.266 37.65,19.406 37.65,19.85 37.471,20.029 37.4,20.1 37.207,20.1 36.923,19.816 36.731,19.816 36.602,19.944 36.602,20.137 37.372,20.906 37.372,21.099 37.244,21.227 37.051,21.227 36.281,20.458 36.089,20.458 35.96,20.586 35.96,20.779 36.693,21.511 36.693,21.704 36.564,21.832 36.372,21.832 36.116,21.576 35.923,21.576 35.731,21.769 35.7,21.8 35.62,21.8 U1.A6
VTX3: U1.A5 U2.P49 | length 43.6
  Top Layer w0.2: U2.P49 17.4,18.8 16.2,17.6 16.2,13.7 16.2,12.715 18.365,10.55 34.25,10.55 38,14.3 38,21 36.6,22.4 34.6,22.4 U1.A5
XIN: C42.2 U3.20 Y1.3 | length 16.1
  Top Layer w0.2: C42.2 Y1.3 23.575,40.525 24.65,41.6 v1(24.675,41.6) ; v1(35.3,40.4) 35.45,40.25 35.507,40.25 35.657,40.1 U3.20
  Bottom Layer w0.2: v1(24.675,41.6) 26.7,41.6 27.9,40.4 v1(35.3,40.4)
XOUT: R4.2 U3.21 | length 9.4
  Top Layer w0.2: R4.2 v1(29,38.2) ; v1(34.843,39.75) 35.443,39.75 35.493,39.7 U3.21
  Bottom Layer w0.2: v1(29,38.2) 30.087,38.2 31.637,39.75 v1(34.843,39.75)
XOUT_R: C43.1 R4.1 Y1.1 | length 6.2
  Top Layer w0.2: C43.1 21.675,38.225 21.875,38.425 21.9,38.425 22.775,39.3 24.2,39.3 25.175,38.325 Y1.1 R4.1@26.925,38.2
pads on no net: P1.1 P1.11 P1.12 P1.13 P1.15 P1.17 P1.26 P1.27 P1.28 P1.29 P1.31 P1.32 P1.33 P1.35 P1.36 P1.37 P1.38 P1.40 U1.D3 U1.D4 U1.E1 U1.E3 U1.E6 U2.GND U2.P1 U2.P2 U2.P12 U2.P13 U2.P18 U2.P19 U2.P20 U2.P21 U2.P22 U2.P23 U2.P27 U2.P38 U2.P39 U3.4 U3.5 U3.35 U3.36 U3.37 U3.38 U3.39 U3.40 U3.41 U3.46 U3.47 Y1.2 Y1.4
copper on no net:
  other v1: 27,39.5 28.5,39.5

## Polygon pours and split planes (outlines as drawn)
GND on Top Layer "GND" (solid, remove dead copper, pour order 3): 0,0 65,0 65,56 0,56
+A3V3 on Top Layer "A3V3" (solid, pour order 2): 5.2,37.8 5,37.6 5,32.4 5.1,32.3 6.9,32.3 7,32.4 7,37.6 6.8,37.8
+D5V0 on Top Layer "D5V0" (solid, pour order 1): 59.975,13.8 60.3,14.125 60.3,20.8 60.1,21 57.5,21 57.5,24.4 60,24.4 60.3,24.7 60.3,31.9 60.1,32.1 57.5,32.1 57.5,35.5 59.9,35.5 60.5,36.1 60.5,46.5 61.8,47.8 65,47.8 65,8 57.925,8 56.9,9.025 56.9,13.8
+D3V3 on Top Layer "D3V3" (solid, pour order 0): 7.4,40.4 7.9,39.9 8.3,39.9 9.2,39.9 9.5,39.6 9.5,38.4 9.2,38.1 3.6,38.1 1.8,39.9 1.8,45.8 6.7,45.8 7.9,44.6 10.2,44.6 10.2,43.4 7.9,43.4 7.4,42.9
GND on Bottom Layer "GND" (solid, remove dead copper, pour order 4): 0,0 65,0 65,56 0,56

## Keep-outs
Keep-Out Layer:
  lines w0.254: -0.001,52.5 cw(c3.5,52.5) 3.5,56.001 61.499,56.001 ; 0,52.5 0,3.5 ccw(c3.5,3.5) 3.5,0 61.5,0 ccw(c61.5,3.5) 65,3.5 65,52.5 ccw(c61.5,52.5) 61.5,56

## Silkscreen, mask and mechanical layers (free items; w line width, h text height)
Top Overlay:
  lines w0.254: 8.5,0.5 8.5,1.5 ; 15,0.5 15,1.5 ; 32,20 32,20.9
Drill Drawing:
  text ".Legend" at 68.854,40.262 h1.52

## Text inside footprints (layer, text, board x,y; h text height)
P1: Top Overlay "39" at 55.6,48 h1.27; Top Overlay "1" at 6.2,48.8 h1.27